# EAGLE board ESP_SIM7000V2.62 (EAGLE 9.6.2)
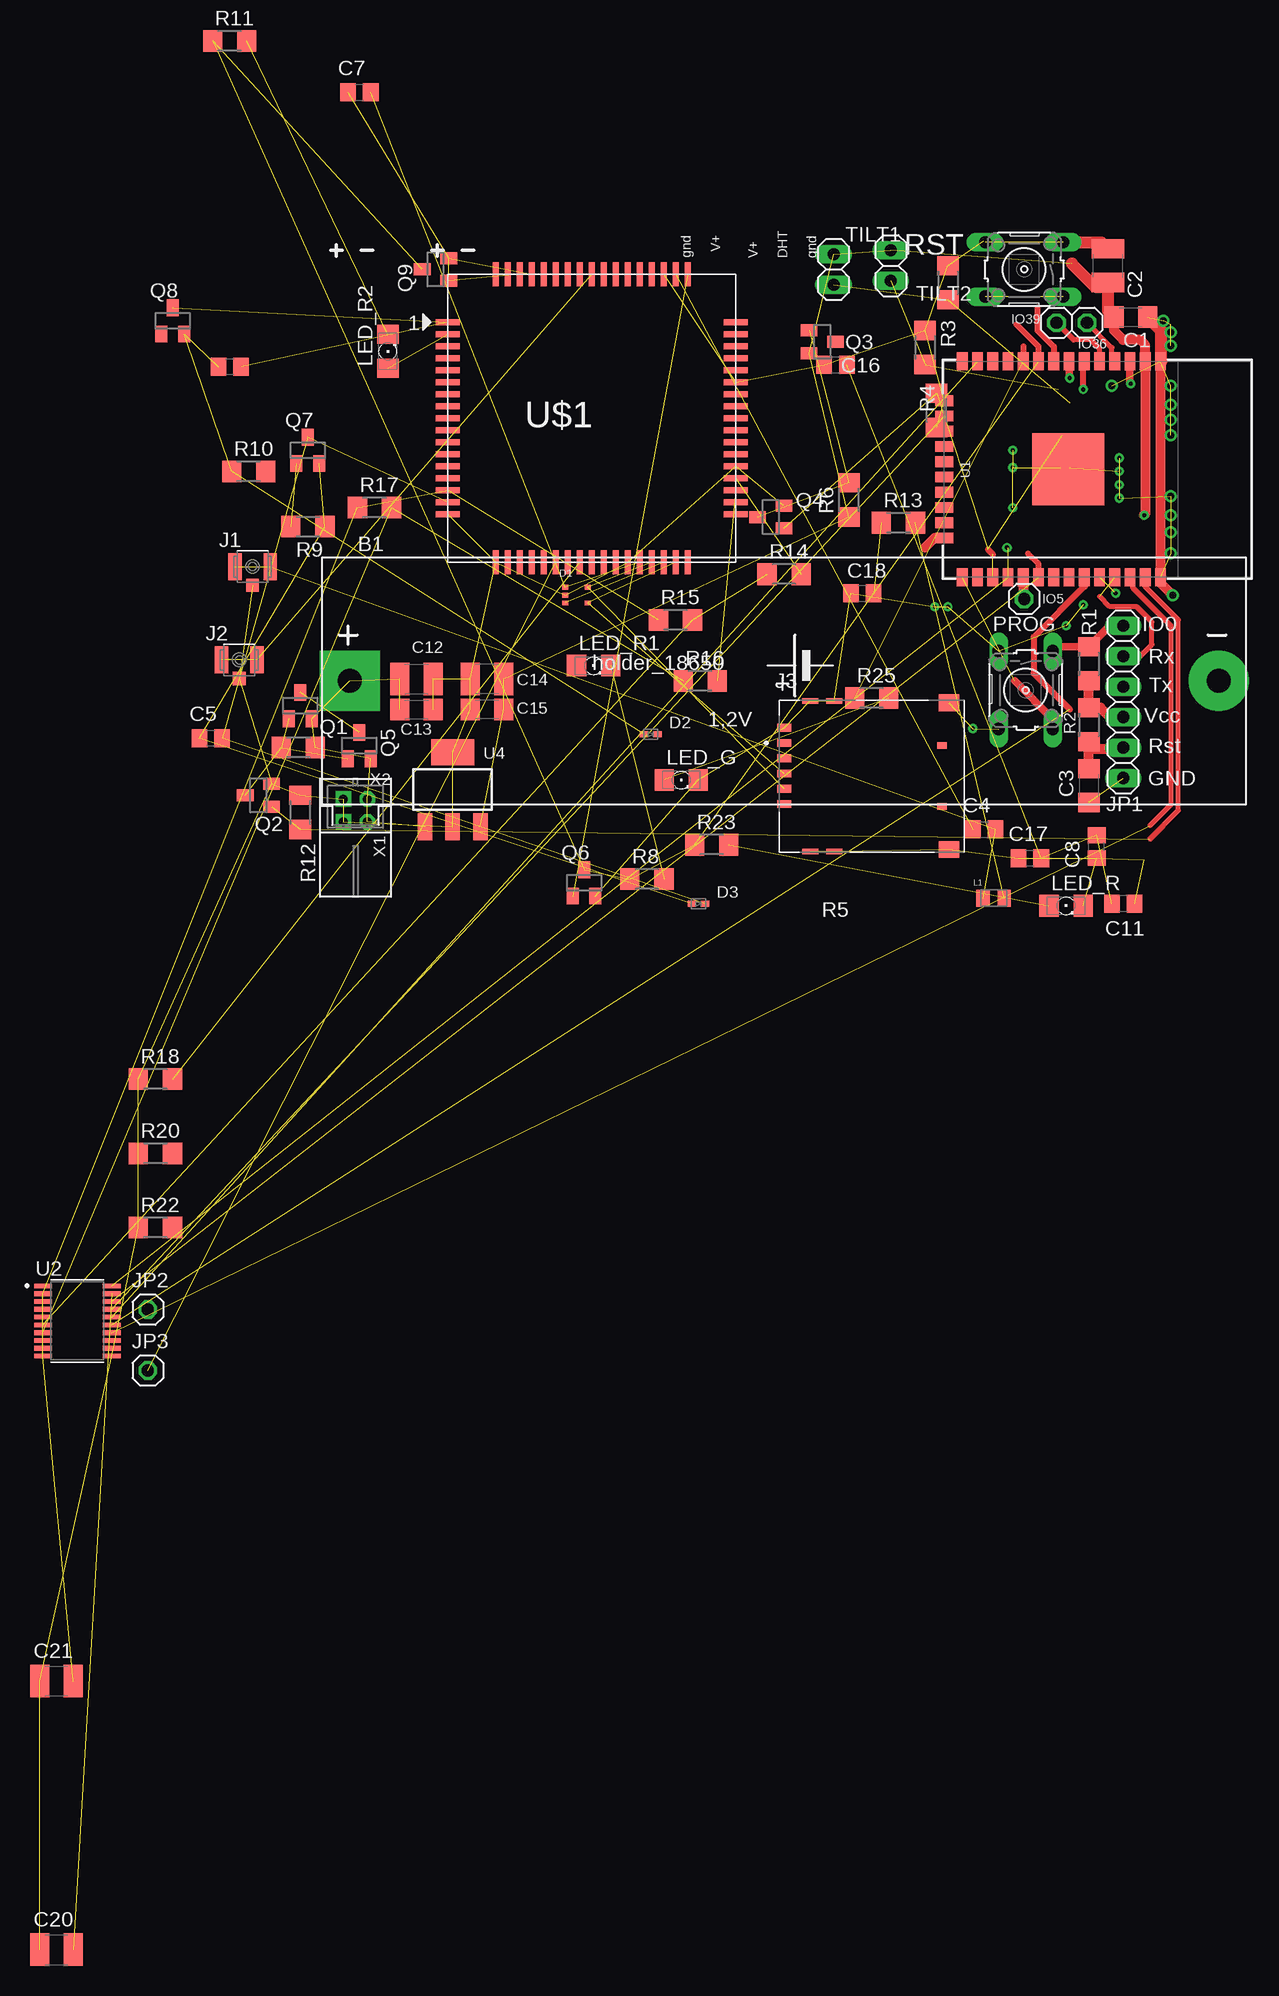
[diagram p0: board, top side]
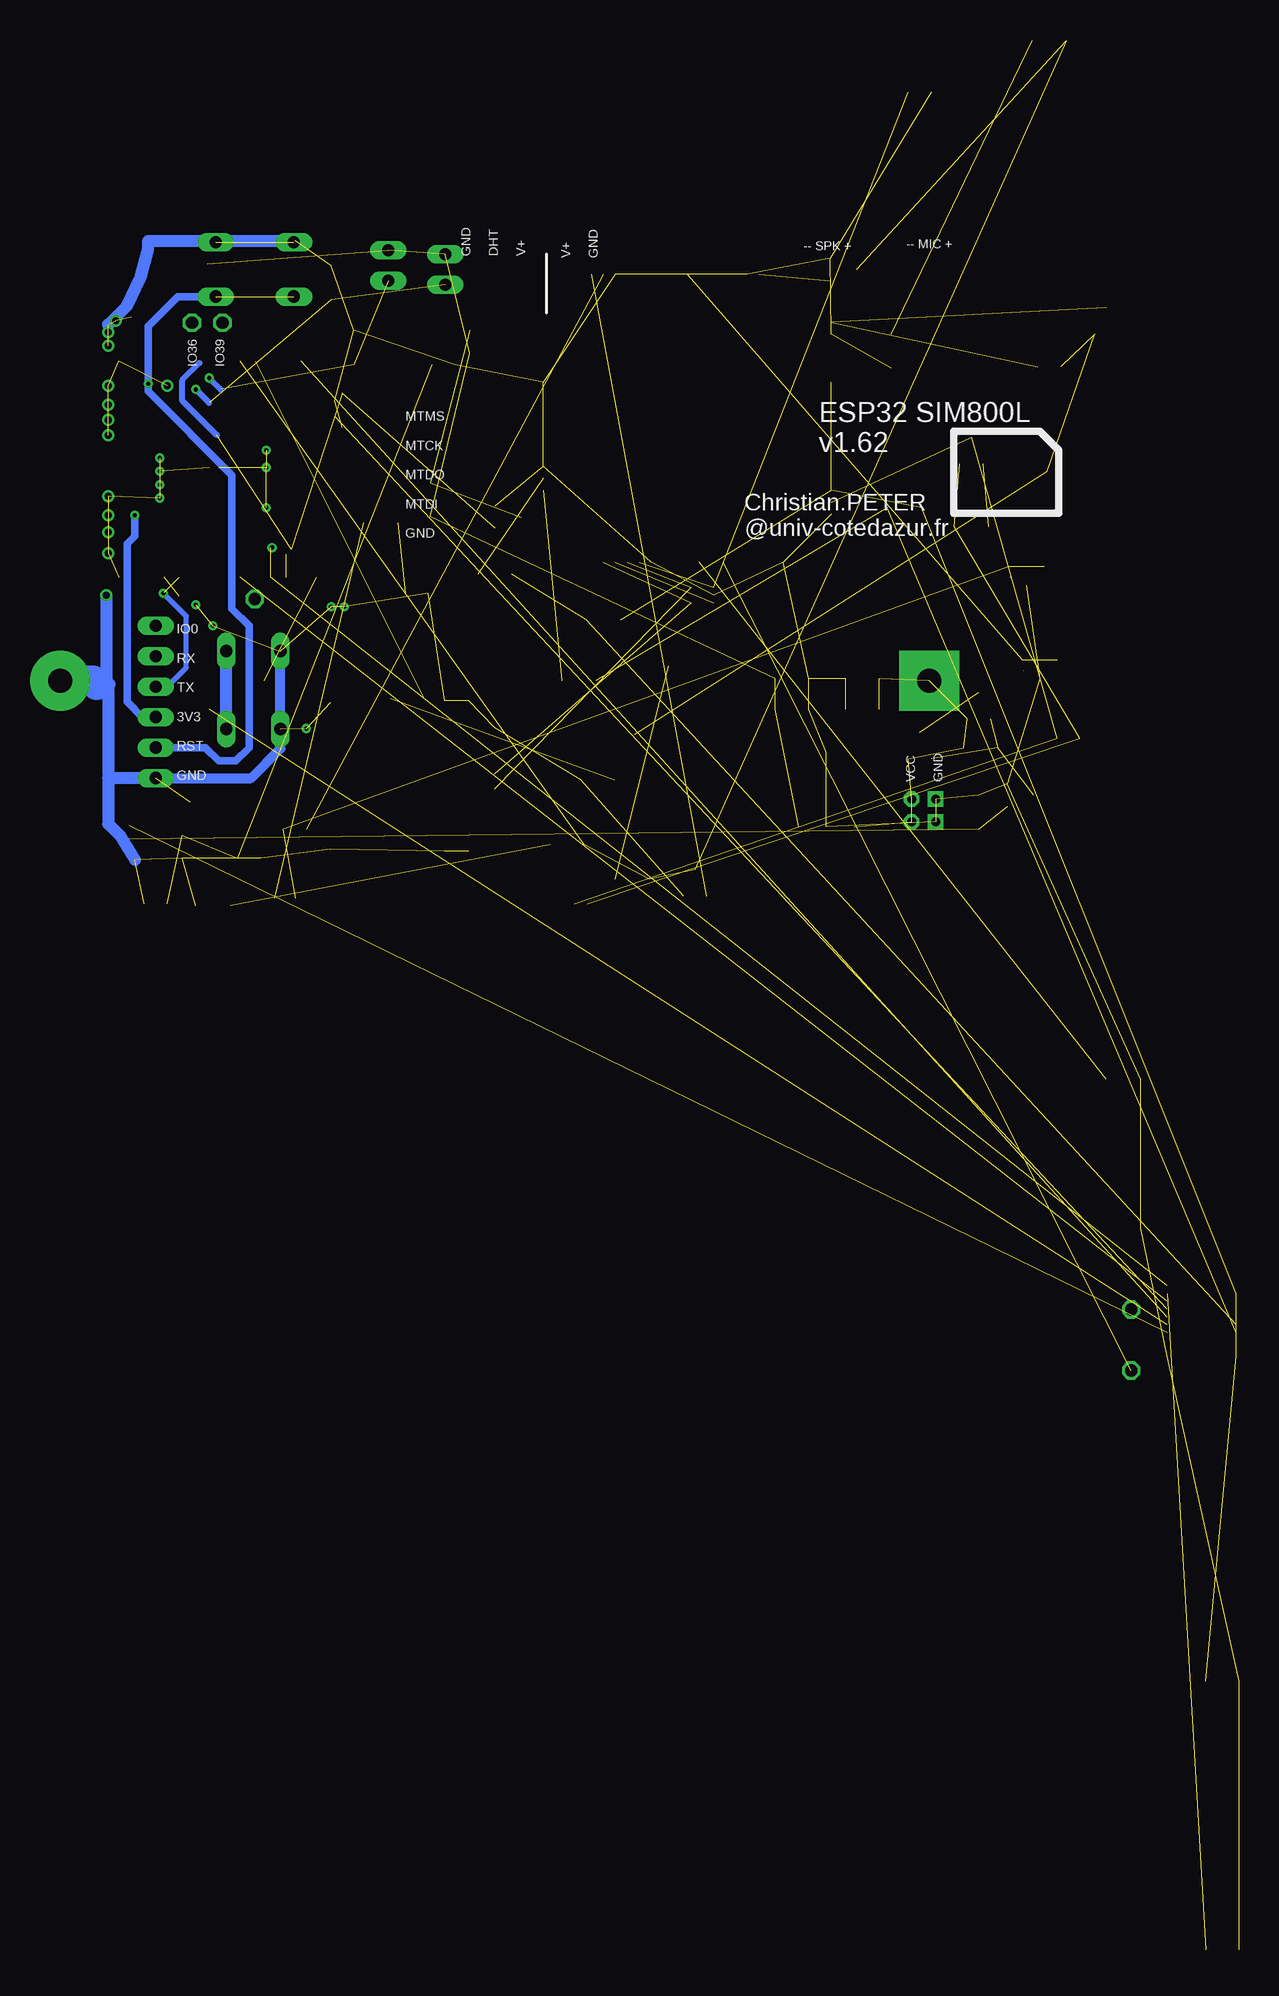
[diagram p1: board, bottom side, seen from below]

No outline drawn. Coordinates in mm, seen from the top.
Copper layers (1*16): Top 0.035mm / dielectric 1.5mm / Bottom 0.035mm
Design rules "default *": minimum track width 6mil, minimum drill 0.35mm, track to track 6mil, track to pad 6mil, pad to pad 6mil, via to via 6mil, smd to smd 6mil, copper to edge 0mil, drill to drill 6mil, minimum pad ring 10mil, minimum via ring 8mil, stop-mask expansion 4mil, vias tented up to drill 0mil, thermal gap 10mil

## Footprints (pad centres in the part's own frame; a part is rotated, then mirrored left to right if it is on the bottom)
18650 = drill 2 pad 5 square: + -36.2,0 | drill 2 pad 5: - 36.2,0
C1206 = smd 1.6 x 1.8: 1 -1.4,0; 2 1.4,0
C1210 = smd 1.6 x 2.7: 1 -1.4,0; 2 1.4,0
C0805 = smd 1.3 x 1.5: 1 -0.95,0; 2 0.95,0
SC88A = smd 0.5 x 0.4: 1 0,0.65; 2 0,0; 3 0,-0.65; 4 1.9,-0.65; 5 1.9,0.65
SOD523 = smd 0.7 x 0.5: 1 0.55,0; 2 -0.55,0
1X01 = drill 1.016 octagon: 1 0,0
HRS_U.FL-R-SMT(01) = smd 1.1 x 2.25: 1 -1.475,0; 2 1.475,0 | smd 1.05 x 1.1: 3 0,-1.55
MOLEX_78646-3001 = smd 1.15 x 0.65: C1 -7.295,2.755; C2 -7.295,0.215; C3 -7.295,-2.325; C5 -7.295,4.025; C6 -7.295,1.485; C7 -7.295,-1.055 | smd 1.3 x 0.45: G1 -5.125,6.27; G2 -3.125,6.27; G3 -5.125,-6.27; G4 -3.125,-6.27 | smd 1.7 x 1.4: G5 6.435,-6.105; G6 6.435,6.105 | smd 0.8 x 0.54: X1 5.855,2.54; X2 5.855,-2.54
1X06 = drill 1.016 long: 1 -6.35,0; 2 -3.81,0; 3 -1.27,0; 4 1.27,0; 5 3.81,0; 6 6.35,0
INDC2012X100N = smd 1.1 x 1.42: 1 -0.885,0; 2 0.885,0
1206 = smd 1.6 x 1.803: A -1.422,0; C 1.422,0
B3F-10XX = drill 1.016 long: 1 -3.251,2.261; 2 3.251,2.261; 3 -3.251,-2.261; 4 3.251,-2.261
SOT23 = smd 1 x 1.4: 1 -0.95,-1.1; 2 0.95,-1.1; 3 0,1.1
R1206 = smd 1.6 x 1.803: 1 -1.422,0; 2 1.422,0
1X02 = drill 1.016 long: 1 -1.27,0; 2 1.27,0
ESP-WROOM-03 = smd 0.9 x 1.5: 1 7.7,9; 2 6.43,9; 3 5.16,9; 4 3.89,9; 5 2.62,9; 6 1.35,9; 7 0.08,9; 8 -1.19,9; 9 -2.46,9; 10 -3.73,9; 11 -5,9; 12 -6.27,9; 13 -7.54,9; 14 -8.81,9; 25 -8.81,-9; 26 -7.54,-9; 27 -6.27,-9; 28 -5,-9; 29 -3.73,-9; 30 -2.46,-9; 31 -1.19,-9; 32 0.08,-9; 33 1.35,-9; 34 2.62,-9; 35 3.89,-9; 36 5.16,-9; 37 6.43,-9; 38 7.7,-9 | smd 1.5 x 0.9: 15 -10.3,5.715; 16 -10.3,4.445; 17 -10.3,3.175; 18 -10.3,1.905; 19 -10.3,0.635; 20 -10.3,-0.635; 21 -10.3,-1.905; 22 -10.3,-3.175; 23 -10.3,-4.445; 24 -10.3,-5.715 | smd 6 x 6: GND 0,0
SOP65P640X120-20N = smd 1.57 x 0.41: 1 -2.87,2.925; 2 -2.87,2.275; 3 -2.87,1.625; 4 -2.87,0.975; 5 -2.87,0.325; 6 -2.87,-0.325; 7 -2.87,-0.975; 8 -2.87,-1.625; 9 -2.87,-2.275; 10 -2.87,-2.925; 11 2.87,-2.925; 12 2.87,-2.275; 13 2.87,-1.625; 14 2.87,-0.975; 15 2.87,-0.325; 16 2.87,0.325; 17 2.87,0.975; 18 2.87,1.625; 19 2.87,2.275; 20 2.87,2.925
SOT223 = smd 1.219 x 2.235: 1 -2.311,-3.099; 2 0,-3.099; 3 2.311,-3.099 | smd 3.6 x 2.2: 4 0,3.099
SIM7000G = smd 2 x 0.5: P$1 -12,8; P$2 -12,7; P$3 -12,6; P$4 -12,5; P$5 -12,4; P$6 -12,3; P$7 -12,2; P$8 -12,1; P$9 -12,0; P$10 -12,-1; P$11 -12,-2; P$12 -12,-3; P$13 -12,-4; P$14 -12,-5; P$15 -12,-6; P$16 -12,-7; P$17 -12,-8; P$35 12,-8; P$36 12,-7; P$37 12,-6; P$38 12,-5; P$39 12,-4; P$40 12,-3; P$41 12,-2; P$42 12,-1; P$43 12,0; P$44 12,1; P$45 12,2; P$46 12,3; P$47 12,4; P$48 12,5; P$49 12,6; P$50 12,7; P$51 12,8 | smd 0.5 x 2: P$18 -8,-12; P$19 -7,-12; P$20 -6,-12; P$21 -5,-12; P$22 -4,-12; P$23 -3,-12; P$24 -2,-12; P$25 -1,-12; P$26 0,-12; P$27 1,-12; P$28 2,-12; P$29 3,-12; P$30 4,-12; P$31 5,-12; P$32 6,-12; P$33 7,-12; P$34 8,-12; P$52 8,12; P$53 7,12; P$54 6,12; P$55 5,12; P$56 4,12; P$57 3,12; P$58 2,12; P$59 1,12; P$60 0,12; P$61 -1,12; P$62 -2,12; P$63 -3,12; P$64 -4,12; P$65 -5,12; P$66 -6,12; P$67 -7,12; P$68 -8,12
S2B-PH-K-S = drill 0.75 pad 1.3 square: 1 1,0 | drill 0.75 pad 1.3 octagon: 2 -1,0
B2B-PH-K-S = drill 0.75 pad 1.3 square: 1 1,0 | drill 0.75 pad 1.3 octagon: 2 -1,0

## Placement (x,y rotation side)
B1  18650_HOLDER  [18650]  52.86,21.91 0 top
C1  100n  [C1206]  81.76,52.23 0 top
C2  10u  [C1210]  79.85,56.52 90 top
C3  100n  [C1206]  78.26,13.18 270 top
C4  33pF  [C0805]  69.53,9.53 0 top
C5  100uF  [C0805]  5.08,17.14 0 top
C6  100uF  [C0805]  6.67,48.1 0 top
C7  0.22uF  [C0805]  17.46,70.96 0 top
C8  1uF  [C0805]  78.9,8.1 90 top
C11  0.1uF  [C0805]  81.12,3.33 180 top
C12  10u  [C1210]  22.23,22.07 0 top
C13  100n  [C1206]  22.23,19.53 0 top
C14  10u  [C1210]  28.1,22.07 180 top
C15  100n  [C1206]  28.1,19.53 180 top
C16  100uF  [C0805]  57.15,48.26 0 top
C17  100uF  [C0805]  73.34,7.14 0 top
C18  100nF  [C0805]  59.37,29.21 0 top
C20  0.1uF  [C1210]  -7.78,-83.82 0 top
C21  0.1uF  [C1210]  -7.78,-61.44 0 top
D1  MSQA6V1W5T2G  [SC88A]  34.61,29.05 0 top
D2  PESD5V0X1UB  [SOD523]  41.75,17.46 0 top
D3  PESD5V0X1UB  [SOD523]  45.72,3.33 0 top
IO5  TP  [1X01]  72.87,28.73 0 top
IO36  [1X01]  78.11,51.75 0 top
IO39  [1X01]  75.56,51.75 90 top
J1  U.FL-R-SMT(01)  [HRS_U.FL-R-SMT(01)]  8.57,31.43 0 top
J2  U.FL-R-SMT(01)  [HRS_U.FL-R-SMT(01)]  7.46,23.65 0 top
J3  78646-3001  [MOLEX_78646-3001]  60.17,13.97 0 top
JP1  [1X06]  81.12,20.16 90 top
JP2  [1X01]  -0.16,-30.48 0 top
JP3  [1X01]  -0.16,-35.56 0 top
L1  27nH  [INDC2012X100N]  70.33,3.81 0 top
LED_G  [1206]  44.29,13.65 0 top
LED_R  [1206]  76.36,3.17 0 top
LED_R1  Bleue  [1206]  36.99,23.18 0 top
LED_R2  Bleue  [1206]  19.84,49.37 90 top
PROG  [B3F-10XX]  72.99,21.15 270 top
Q1  SI2305CDS  [SOT23]  12.54,19.84 0 top
Q2  BSS138  [SOT23]  9.05,12.38 90 top
Q3  SI2305CDS  [SOT23]  56.04,50.16 270 top
Q4  BSS138  [SOT23]  51.75,35.56 90 top
Q5  SI2305CDS  [SOT23]  17.46,16.51 0 top
Q6  BSS138  [SOT23]  36.2,5.08 0 top
Q7  BSS138  [SOT23]  13.18,41.12 0 top
Q8  BSS138  [SOT23]  1.91,51.91 0 top
Q9  BSS138  [SOT23]  23.81,56.2 90 top
R1  100k  [R1206]  78.26,23.34 90 top
R2  10k  [R1206]  78.26,18.26 90 top
R3  1M  [R1206]  66.52,55.09 90 top
R4  1M  [R1206]  64.61,49.69 90 top
R5  33k  [R1206]  12.38,16.35 0 top
R6  33k  [R1206]  58.26,36.99 270 top
R7  100k  [R1206]  65.56,44.45 270 top
R8  470  [R1206]  41.43,5.4 0 top
R9  33k  [R1206]  13.18,34.77 180 top
R10  33k  [R1206]  8.26,39.37 0 top
R11  470  [R1206]  6.67,75.25 0 top
R12  100k  [R1206]  12.54,10.95 90 top
R13  10  [R1206]  62.39,35.08 0 top
R14  NC  [R1206]  52.86,30.8 0 top
R15  2.2k  [R1206]  43.81,26.99 0 top
R16  NC  [R1206]  45.88,21.91 0 top
R17  2.2k  [R1206]  18.73,36.35 0 top
R18  NC  [R1206]  0.48,-11.27 0 top
R20  NC  [R1206]  0.48,-17.46 0 top
R22  10k  [R1206]  0.48,-23.65 0 top
R23  150  [R1206]  46.83,8.26 0 top
R25  100  [R1206]  60.17,20.48 0 top
RST  [B3F-10XX]  72.87,56.2 180 top
TILT1  [1X02]  56.99,56.2 90 top
TILT2  [1X02]  61.75,56.52 90 top
U1  ESP-WROOM-03  [ESP-WROOM-03]  76.53,39.54 0 top
U2  TXB0108PWR  [SOP65P640X120-20N]  -6.03,-31.43 0 top
U4  MIC5239S  [SOT223]  25.24,12.86 0 top
U$1  SIM7000G  [SIM7000G]  36.83,43.81 0 top
X1  S2B-PH-K-S  [S2B-PH-K-S]  17.14,10.16 180 top
X2  B2B-PH-K-S  [B2B-PH-K-S]  17.14,12.06 180 top

## Library data of the parts
B1 = battery_bms
C1-C3 C12-C15 C20 C21 = eagle-ltspice; SPICEMODEL: NONE; SPICEPREFIX: C
C4-C8 C11 C16-C18 = rcl; SPICEPREFIX: C
D1 = MSQA6V1W5T2G; AVAILABILITY: In Stock; CHECK_PRICES: https://www.snapeda.com/parts/MSQA6V1W5T2G/Onsemi/view-part/?ref=eda; DESCRIPTION: Clamp Ipp Tvs Diode Surface Mount SC-88A (SC-70-5/SOT-353); MF: onsemi; MP: MSQA6V1W5T2G; PACKAGE: SC-88A-5 ON Semiconductor; PRICE: None; PURCHASE-URL: https://www.snapeda.com/api/url_track_click_mouser/?unipart_id=7122110&manufacturer=onsemi&part_name=MSQA6V1W5T2G&search_term=msqa6v1w5t2g; SNAPEDA_LINK: https://www.snapeda.com/parts/MSQA6V1W5T2G/Onsemi/view-part/?ref=snap
D2 D3 = PESD5V0X1UB; AVAILABILITY: In Stock; CHECK_PRICES: https://www.snapeda.com/parts/PESD5V0X1UB/Nexperia/view-part/?ref=eda; DESCRIPTION: 8V (Typ) Clamp 1.5A (8/20µs) Ipp Tvs Diode Surface Mount SOD-523; MF: Nexperia USA; MP: PESD5V0X1UB; PACKAGE: SOD-523 NXP Semiconductors; PRICE: None; SNAPEDA_LINK: https://www.snapeda.com/parts/PESD5V0X1UB/Nexperia/view-part/?ref=snap
IO5 IO36 IO39 JP1-JP3 TILT1 TILT2 = pinhead
J1 J2 = U.FL-R-SMT_01_; AVAILABILITY: In Stock; CHECK_PRICES: https://www.snapeda.com/parts/U.FL-R-SMT(01)/Hirose+Electric+Co+Ltd/view-part/?ref=eda; DESCRIPTION: U.FL (UMCC) Connector Receptacle, Male Pin 50Ohm Surface Mount Solder. RF Connectors / Coaxial Connectors; MF: Hirose; MP: U.FL-R-SMT(01); PACKAGE: None; PRICE: None; PURCHASE-URL: https://www.snapeda.com/api/url_track_click_mouser/?unipart_id=49572&manufacturer=Hirose&part_name=U.FL-R-SMT(01)&search_term=None; SNAPEDA_LINK: https://www.snapeda.com/parts/U.FL-R-SMT(01)/Hirose+Electric+Co+Ltd/view-part/?ref=snap
J3 = SIM; AVAILABILITY: In Stock; CHECK_PRICES: https://www.snapeda.com/parts/78646-3001/Molex/view-part/?ref=eda; DESCRIPTION: Horizontal Surface Mount Micro SIM Card Connector, with Push In Termination | Molex Incorporated 78646-3001; MF: Molex; MP: 78646-3001; PACKAGE: None; PRICE: None; PURCHASE-URL: https://www.snapeda.com/api/url_track_click_mouser/?unipart_id=75189&manufacturer=Molex&part_name=78646-3001&search_term=micro sim; SNAPEDA_LINK: https://www.snapeda.com/parts/78646-3001/Molex/view-part/?ref=snap
L1 = LQM21PN1R0NGRD; CHECK_PRICES: https://www.snapeda.com/parts/LQM21PN1R0NGRD/Murata+Electronics+North+America/view-part/?ref=eda; DESCRIPTION: Inductor with Inductance: 1uH Tol. +/-30%, Package: 0805 (2012); MF: Murata; MP: LQM21PN1R0NGRD; PACKAGE: 2012 Murata; PURCHASE-URL: https://www.snapeda.com/api/url_track_click_mouser/?unipart_id=1499484&manufacturer=Murata&part_name=LQM21PN1R0NGRD&search_term=inductance 0805; RS_COMPONENTS_1674235_PURCHASE_URL: https://www.snapeda.com/api/url_track_click/https%253A//uk.rs-online.com/web/p/surface-mount-inductors/1674235//%253Futm_campaign%253Dbuynow%2526utm_medium%253Daggregator%2526utm_source%253Dsnapeda%2526cm_mmc%253Daff-_-uk-_-snapeda-_-1674235/?unipart_id=1499484&manufacturer=Murata&part_name=LQM21PN1R0NGRD&search_term=inductance 0805; RS_COMPONENTS_7867096P_PURCHASE_URL: https://www.snapeda.com/api/url_track_click/https%253A//uk.rs-online.com/web/p/surface-mount-inductors/7867096p//%253Futm_campaign%253Dbuynow%2526utm_medium%253Daggregator%2526utm_source%253Dsnapeda%2526cm_mmc%253Daff-_-uk-_-snapeda-_-7867096P/?unipart_id=1499484&manufacturer=Murata&part_name=LQM21PN1R0NGRD&search_term=inductance 0805; RS_COMPONENTS_7867096_PURCHASE_URL: https://www.snapeda.com/api/url_track_click/https%253A//uk.rs-online.com/web/p/surface-mount-inductors/7867096//%253Futm_campaign%253Dbuynow%2526utm_medium%253Daggregator%2526utm_source%253Dsnapeda%2526cm_mmc%253Daff-_-uk-_-snapeda-_-7867096/?unipart_id=1499484&manufacturer=Murata&part_name=LQM21PN1R0NGRD&search_term=inductance 0805; SNAPEDA_LINK: https://www.snapeda.com/parts/LQM21PN1R0NGRD/Murata+Electronics+North+America/view-part/?ref=snap
LED_G LED_R LED_R1 LED_R2 = led
PROG RST = switch-omron; MPN: B3F-1000; OC_FARNELL: 176432; OC_NEWARK: 36M3542
Q1-Q9 = transistor-small-signal-perso
R1-R18 R20 R22 R23 R25 = eagle-ltspice; SPICEMODEL: NONE; SPICEPREFIX: R
U1 = esp32-sparkfun (1); OC_FARNELL: unknown
U2 = TXB0108PWR; CHECK_PRICES: https://www.snapeda.com/parts/TXB0108PWR/Texas+Instruments/view-part/?ref=eda; DESCRIPTION: 8-Bit Bidirectional Voltage-Level Shifter with Auto Direction Sensing and +/-15-kV ESD Protect; MF: Texas Instruments; MP: TXB0108PWR; PACKAGE: TSSOP-20 Texas Instruments; PURCHASE-URL: https://www.snapeda.com/api/url_track_click_mouser/?unipart_id=45111&manufacturer=Texas Instruments&part_name=TXB0108PWR&search_term=txb0108; RS_COMPONENTS_7099038P_PURCHASE_URL: https://www.snapeda.com/api/url_track_click/https%253A//uk.rs-online.com/web/p/translator-ics/7099038p//%253Futm_campaign%253Dbuynow%2526utm_medium%253Daggregator%2526utm_source%253Dsnapeda%2526cm_mmc%253Daff-_-uk-_-snapeda-_-7099038P/?unipart_id=45111&manufacturer=Texas Instruments&part_name=TXB0108PWR&search_term=txb0108; RS_COMPONENTS_7099038_PURCHASE_URL: https://www.snapeda.com/api/url_track_click/https%253A//uk.rs-online.com/web/p/translator-ics/7099038//%253Futm_campaign%253Dbuynow%2526utm_medium%253Daggregator%2526utm_source%253Dsnapeda%2526cm_mmc%253Daff-_-uk-_-snapeda-_-7099038/?unipart_id=45111&manufacturer=Texas Instruments&part_name=TXB0108PWR&search_term=txb0108; RS_COMPONENTS_9215119_PURCHASE_URL: https://www.snapeda.com/api/url_track_click/https%253A//uk.rs-online.com/web/p/translator-ics/9215119//%253Futm_campaign%253Dbuynow%2526utm_medium%253Daggregator%2526utm_source%253Dsnapeda%2526cm_mmc%253Daff-_-uk-_-snapeda-_-9215119/?unipart_id=45111&manufacturer=Texas Instruments&part_name=TXB0108PWR&search_term=txb0108; SNAPEDA_LINK: https://www.snapeda.com/parts/TXB0108PWR/Texas+Instruments/view-part/?ref=snap
U4 = micrel
U$1 = SIM7000G; CHECK_PRICES: https://www.snapeda.com/parts/SIM7000G/SIMCom/view-part/?ref=eda; DESCRIPTION: 802.15.4 Cat-M, Cat-NB, EDGE, GPRS, LPWA Transceiver Module 850MHz, 900MHz, 1.8GHz, 1.9GHz Antenna Not Included Surface Mount; MF: SIMCom Wireless Solutions Limited; MP: SIM7000G; PACKAGE: None; PURCHASE-URL: https://www.snapeda.com/api/url_track_click_mouser/?unipart_id=12130268&manufacturer=SIMCom Wireless Solutions Limited&part_name=SIM7000G&search_term=sim7000g; SNAPEDA_LINK: https://www.snapeda.com/parts/SIM7000G/SIMCom/view-part/?ref=snap
X1 X2 = con-JST PH

## Nets
+1V8: C21.2 R15.1 R17.1 U2.2 U2.10 U$1.P$6 U$1.P$15
+3V3: C1.1 C2.1 C14.1 C15.1 JP1.3 Q3.2 R1.1 R2.2 R6.2 TILT1.2 TILT2.2 U1.2 U4.3
+5V: C20.2 U2.19
DHT: U1.8
GND: B1.- C1.2 C2.2 C3.2 C7.1 C8.1 C11.1 C12.2 C13.2 C14.2 C15.2 C16.1 C17.1 C18.1 C20.1 C21.1 D1.2 J1.3 J2.3 J3.C5 J3.G1 J3.G2 J3.G3 J3.G4 J3.G5 J3.G6 JP1.1 LED_G.C LED_R2.A LED_R.C PROG.3 PROG.4 Q2.2 Q4.2 Q6.2 Q9.2 R3.2 R4.2 R7.2 R12.2 R18.1 R22.1 RST.3 RST.4 U1.1 U1.15 U1.38 U1.GND U2.11 U4.2 U4.4 U$1.P$2 U$1.P$17 U$1.P$18 U$1.P$29 U$1.P$39 U$1.P$45 U$1.P$46 U$1.P$54 U$1.P$55 U$1.P$56 U$1.P$57 U$1.P$58 U$1.P$59 U$1.P$61 U$1.P$62 U$1.P$63 U$1.P$64 U$1.P$65 X1.1 X2.1
IO0: JP1.6 PROG.1 PROG.2 R1.2 U1.25
IO36: IO36.1 U1.4
IO39: IO39.1 U1.5
LED_G: R25.1 U1.10
LED_R: Q6.3 Q9.3 R8.1 R11.1 R23.1 U1.9
LTE_DTR: U$1.P$3
LTE_RI: U$1.P$4
LTE_RXD: U$1.P$10
LTE_SCL: R16.1 R17.2 U2.7
LTE_SDA: R14.1 R15.2 U2.6
LTE_TXD: U$1.P$9
MEASURE: Q4.1 R7.1 U1.27
N$1: Q1.1 Q2.3 Q5.1 R5.1
N$2: Q3.1 Q4.3 R6.1
N$3: J2.1 J2.2 U$1.P$60
N$4: C4.2 J1.1 J1.2 L1.1
N$5: C4.1 U$1.P$53
N$6: C5.2 D3.1 Q7.3 U$1.P$16
N$7: LED_R.A R23.2
N$8: LED_G.A R25.2
N$10: LED_R1.C R8.2
N$11: J3.C1
N$13: D1.5 J3.C7 U$1.P$31
N$14: D1.4 J3.C2 U$1.P$33
N$15: LED_R1.A
N$17: IO5.1 U1.29
N$18: R10.2
N$19: C8.2 C11.2 C16.2 C17.2
N$22: C5.1 D3.2 Q7.2 R9.1
N$25: C6.1 D2.2 Q8.2 R10.1
N$31: D2.1
N$33: LED_R2.C R11.2
N$34: R20.1
N$35: C18.2 R13.1
N$36: L1.2 R13.2
N$37: D1.3 U$1.P$32
N$38: R14.2 U$1.P$38
N$39: R16.2 U$1.P$37
N$40: C7.2 D1.1 U$1.P$30
N$41: J3.C3
N$42: R18.2 U$1.P$25
N$43: R22.2
N$44: U$1.P$34
N$45: JP3.1 U$1.P$23
NETLIGHT: Q6.1 U$1.P$52
NEXT: U1.26
NRESET_OUT: Q7.1 R9.2
POWER: Q2.1 R12.1 U1.37
PWR_STAT: Q9.1 U$1.P$66
PWRKEY_IN: C6.2 Q8.3 U$1.P$1
PWRKEY_OUT: Q8.1
RST: C3.1 JP1.2 R2.1 RST.1 RST.2 U1.3
RX: JP1.5 U1.35
TILT1: R3.1 TILT1.1 U1.6
TILT2: R4.1 TILT2.1 U1.7
TX: JP1.4 U1.34
UC_DRT: U1.13 U2.16
UC_RI: U1.16 U2.17
UC_RX: U1.28 U2.20
UC_SCL: U1.36 U2.14
UC_SDA: U1.33 U2.15
UC_TX: U1.30 U2.18
V+: Q1.3 Q5.3
VALID: U1.24
VCC: B1.+ C12.1 C13.1 Q1.2 Q5.2 R5.2 U4.1 X1.2 X2.2
VDD: Q3.3
VPP: J3.C6

## Tracks (layer width: path | path; a pad name or v marks a point on that pad's centre or on a via)
+1V8  (6 unrouted)
+3V3  (via drill 0.35)  (7 unrouted)
  Top 0.813: JP1.3 80.01,18.89 79.22,19.68 R2.2 R1.1 | C1.1 80.36,51.09 81.12,50.32 82.55,50.32 82.96,49.92 U1.2 82.96,35.81 v82.87,35.72
  Top 1.016: 76.83,56.67 78.74,54.77 79.5,54.77 C2.1 79.85,52.73 C1.1
  Bottom 0.61: JP1.3 82.23,18.89 83.5,20.16 83.5,33.34 82.87,33.97 v82.87,35.72
+5V  (1 unrouted)
DHT
  Top 0.508: U1.8 75.34,49.76 73.98,51.12 73.98,53.02
GND  (via drill 0.35, 0.6)  (87 unrouted)
  Top 0.61: U1.GND 76.68,39.69
  Top 0.813: v85.25,29.05 84.23,30.07 U1.38 U1.1 84.27,48.58 84.3,48.58
  Top 1.016: 75.88,39.69 76.38,39.69 U1.GND | 84.3,48.58 84.3,51.09 C1.2 | RST.3 79.31,58.46 C2.2
  Bottom 0.813: RST.3 76.24,58.58 | JP1.1 73.18,13.81 70.73,16.26 PROG.4 PROG.3
  Bottom 1.016: v85.25,29.05 85.25,21.59 | 85.09,21.59 85.09,13.81 | 85.09,13.81 85.09,10 84.14,9.05 82.87,6.99 | 85.09,51.59 83.5,53.18 82.39,55.56 81.76,57.89 81.76,58.58 69.74,58.58 RST.4 69.49,58.58 | JP1.1 85.09,13.81
  Bottom 1.27: 86.04,21.59 85.25,21.59 85.09,21.59
  Bottom 2.54: B1.- 86.36,21.91 86.04,21.59
  other vias: 85.09,44.93 85.09,37.31 85.09,43.66 85.09,32.54 85.09,46.51 85.09,42.39 85.09,35.72 85.09,34.29 71.91,41.12 71.91,39.69 71.91,36.35 66.52,28.1 65.41,28.1 68.58,17.94 85.09,49.85 80.17,46.51 84.45,51.91 85.09,50.96 76.36,26.51 77.79,28.26 80.8,40.48 80.8,39.37 80.8,38.26 80.8,37.15
IO0  (1 unrouted)
  Top 0.61: PROG.2 75.25,18.73 72.07,21.91 | PROG.1 75.61,24.76 R1.2 80.02,26.51 JP1.6
  Bottom 1.016: PROG.2 PROG.1
IO36
  Top 0.406: U1.4 80.42,48.96 80.17,49.21 80.17,49.69 IO36.1
IO39
  Top 0.406: U1.5 79.15,49.6 78.42,50.32 76.99,50.32 IO39.1
LED_G  (1 unrouted)
  Top 0.508: 72.8,49.76 U1.10
LED_R  (5 unrouted)
  Top 0.508: U1.9 74.07,49.76 72.23,51.59
LTE_SCL  (2 unrouted)
LTE_SDA  (2 unrouted)
MEASURE  (4 unrouted)
  Top 0.508: 70.26,32.45 69.85,32.86
  Bottom 0.508: 77.47,48.42 78.9,46.99 78.9,45.24 76.04,42.39
N$1  (3 unrouted)
N$2  (2 unrouted)
N$3  (2 unrouted)
N$4  (3 unrouted)
N$5  (1 unrouted)
N$6  (3 unrouted)
N$7  (1 unrouted)
N$8  (1 unrouted)
N$10  (1 unrouted)
N$13  (2 unrouted)
N$14  (2 unrouted)
N$17
  Top 0.813: U1.29 72.8,28.8 IO5.1
N$19  (3 unrouted)
N$22  (3 unrouted)
N$25  (3 unrouted)
N$33  (1 unrouted)
N$35  (1 unrouted)
N$36  (1 unrouted)
N$37  (1 unrouted)
N$38  (1 unrouted)
N$39  (1 unrouted)
N$40  (2 unrouted)
N$42  (1 unrouted)
N$45  (1 unrouted)
NETLIGHT  (1 unrouted)
NRESET_OUT  (1 unrouted)
POWER  (2 unrouted)
  Top 0.406: 83.34,8.73 85.72,11.11 85.72,26.99 82.96,29.75 U1.37
PWR_STAT  (1 unrouted)
PWRKEY_IN  (2 unrouted)
RST  (via drill 0.35)  (1 unrouted)
  Top 0.61: v81.76,46.67 81.69,46.74 U1.3
  Top 0.813: C3.1 78.26,16.19 | 78.26,16.19 R2.1 | JP1.2 80.96,16.19 78.26,16.19
  Bottom 0.61: JP1.2 76.99,16.35 75.88,15.24 74.45,15.24 73.34,16.35 73.34,26.51 74.77,27.94 74.77,39.05 81.76,46.04 v81.76,46.67 81.76,51.47 79.29,53.94 RST.1
RX  (1 unrouted)
  Top 0.406: JP1.5 82.55,23.97 83.5,24.92 83.5,26.83 82.23,28.1 80.01,28.1 79.15,28.96
TILT1  (via drill 0.35)  (2 unrouted)
  Top 0.508: v77.79,46.2 77.79,48.45 U1.6
  Bottom 0.508: 76.68,45.09 v77.79,46.2
TILT2  (via drill 0.35)  (2 unrouted)
  Top 0.61: v76.68,47.15 76.61,47.22 U1.7
  Bottom 0.508: 75.72,46.2 v76.68,47.15
TX  (via drill 0.35)  (1 unrouted)
  Top 0.61: 80.42,29.28 v80.49,29.21
  Bottom 0.406: JP1.4 80.17,21.43 78.58,23.02 78.58,27.3 v80.49,29.21
UC_DRT  (1 unrouted)
UC_RI  (1 unrouted)
UC_RX  (via drill 0.35)  (2 unrouted)
  Top 0.508: 71.53,33.02 v71.44,33.02
UC_SCL  (1 unrouted)
  Top 0.406: 83.34,9.84 85.09,11.59 85.09,26.51 81.92,29.69 81.92,30.31 U1.36
UC_SDA  (1 unrouted)
  Top 0.508: 77.88,29.78 73.66,25.56 73.66,22.54 76.68,19.53
  Top 0.61: 77.88,30.22 78.04,30.38 U1.33 77.88,29.78
UC_TX  (1 unrouted)
  Top 0.508: U1.30 74.07,31.66 73.18,32.54
V+  (1 unrouted)
VALID
  Top 0.61: 66.08,33.97 U1.24
  Top 0.813: U1.24 65.41,33.82 64.61,33.01
VCC  (8 unrouted)

## Text on the board
tNames: gnd / / V+ | V+ / / DHT / / gnd | IO0 | Rx | Tx | Vcc | Rst | GND
bNames: -- MIC + | -- SPK + | V+ / / GND | GND / / DHT / / V+ | IO36 / / IO39 | ESP32 SIM800L / v1.62 | Christian.PETER / @univ-cotedazur.fr | MTMS / / MTCK / / MTDO / / MTDI / / GND | IO0 / / RX / / TX / / 3V3 / / RST / / GND | VCC / / GND